# Altium PCB MP2225.PcbDoc
Units mil, origin at the board's own origin, x right, y up, seen from the top; angles counter-clockwise.
Board outline 600 x 635 mil, 2 copper layers (Top Layer, Bottom Layer); 15 components, 8 nets, 33 pads, 0 vias.
Unrouted connection lines stored in the file: 15.
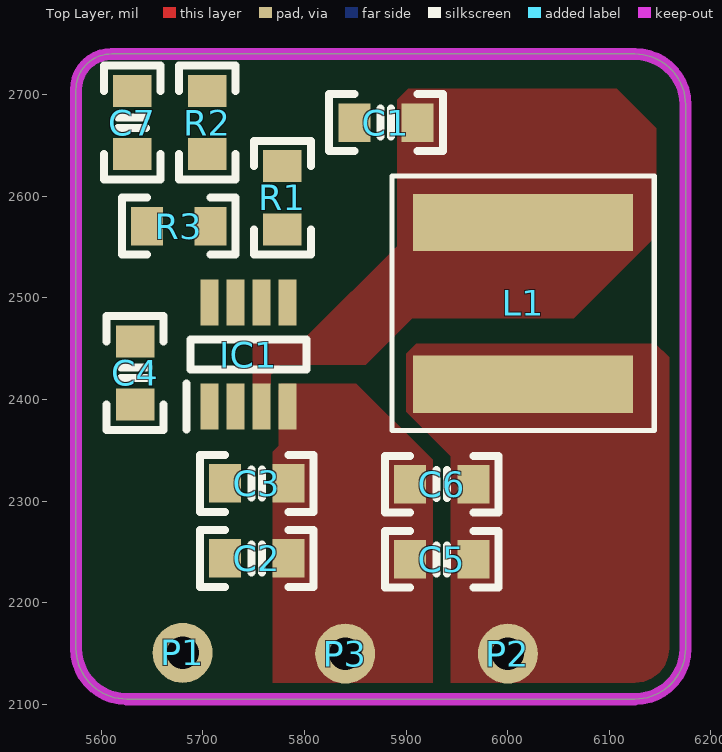
[diagram p0: Top Layer view]
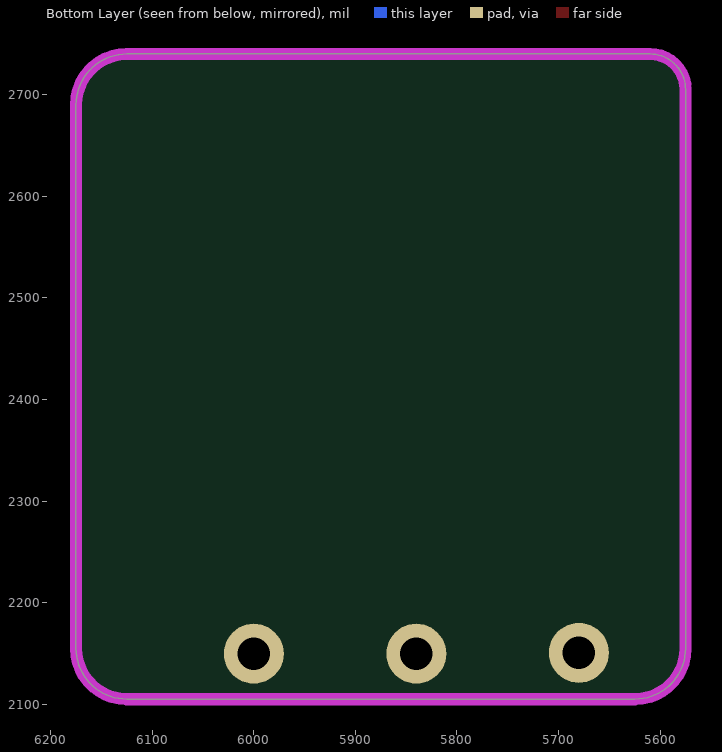
[diagram p1: Bottom Layer view, seen from below]

## Layer stack, top to bottom
Top Solder: solder mask 0.4, Solder Resist, Dk 3.5
Top Layer: signal copper 1.4
Dielectric 1: dielectric 12.6, FR-4, Dk 4.8
Bottom Layer: signal copper 1.4
Bottom Solder: solder mask 0.4, Solder Resist, Dk 3.5

## Board outline
5575,2155 5575,2705 cw(c5610,2705) 5610,2740 6125,2740 cw(c6125,2690) 6175,2690 6175,2155 cw(c6125,2155) 6125,2105 5625,2105 cw(c5625,2155)

## Design rules (kind name [scope] priority, off if disabled: settings)
Clearance [All] p1: gap=10 ignorepadtopadclearanceinfootprint=FALSE except(0: Arc-Hole Track-Hole SMDPad-Fill SMDPad-Poly SMDPad-Region SMDPad-Hole THPad-Hole Via-Hole Fill-Hole Poly-Hole Region-Hole Text-Hole)
PlaneConnect [All] p1: planeconnectstyle=Direct reliefexpansion=20 reliefentries=4 reliefconductorwidth=10 reliefairgap=10
PolygonConnect [All] p1: connectstyle=Direct reliefconductorwidth=10 reliefentries=4 polygonreliefangle="90 Angle" airgapwidth=10
RoutingVias [All] p1: holewidth=17.72 width=29.53 viastyle="Through Hole" minholewidth=17.72 minwidth=29.53 maxholewidth=17.72 maxwidth=29.53
SolderMaskExpansion [All] p1: expansion=4 istentingtop=FALSE
Width [All] p1: maxlimit=100 minlimit=10 preferedwidth=15
29 further rules are at their usual default settings.

## Components (designator, comment, footprint, x,y, rotation, side; value= is the part's Value field where it differs from the comment)
C1 "100nF" CAP-0603 5880,2672.5 r180 top
C2 "22uF/25V" CAP-0603 5753,2243.51 r180 top
C3 "100nF/25V" CAP-0603 5753,2317.39 r180 top
C4 "100nF" CAP-0603 5633.17,2426.1 r90 top
C5 "22uF/10V" CAP-0603 5935,2242.67 r0 top
C6 "22uF/10V" CAP-0603 5935,2316.56 r0 top
C7 "33pF" CAP-0603 5630.35,2672.46 r90 top
IC1 "MP2225GJ-P" TSOT-23-8 5745,2443.98 r90 top locked
L1 "4.7uH 6.8A" XAL6060-103MEB 6015,2494.53 r90 top
P1 "HDR1x2_2.54" HDR1X1_2.54 5680,2150.56 r90 top
P2 "HDR1x2_2.54" HDR1X1_2.54 6000,2149.73 r90 top
P3 "HDR1x2_2.54" HDR1X1_2.54 5840,2149.73 r90 top
R1 "100k" R-0603 5778.12,2598.58 r270 top
R2 "40.2k" R-0603 5704.23,2672.46 r90 top
R3 "5.49k" R-0603 5676.23,2570.58 r0 top

## Footprints (in the part's own frame and the unit in brackets; to place one, negate y for a bottom-side part, rotate by r counter-clockwise, add the part's x,y. Pads: shape width x height; smd on the part's side, far side on the other; paste and mask are expansions set on the pad)
CAP-0603 [mm]
  rect 0.8x0.96 smd: 1(-0.79,0) 2(0.79,0)
  silkscreen extent -1.42,-0.71 1.42,0.71, body extent -0.76,-0.39 0.76,0.39, height 0.9
HDR1X1_2.54 [mm]
  round 1.5 hole 0.813: 1(0,0)
R-0603 [mm]
  rect 0.8x0.96 smd: 1(-0.79,0) 2(0.79,0)
  silkscreen extent -1.42,-0.71 1.42,0.71, body extent -0.76,-0.38 0.76,0.38, height 0.41
TSOT-23-8 [mm]
  rect 1.15x0.45 smd: 1(-1.3,0.975) 2(-1.3,0.325) 3(-1.3,-0.325) 4(-1.3,-0.975) 5(1.3,-0.975) 6(1.3,-0.325) 7(1.3,0.325) 8(1.3,0.975)
  silkscreen extent -1.88,-1.45 0.38,1.55, body extent -1.4,-1.45 1.4,1.45, height 1
XAL6060-103MEB [mm]
  rect 1.43x5.5 smd: 1(-2.02,0) 2(2.02,0)
  silkscreen extent -3.18,-3.28 3.18,3.28, body extent -3.18,-3.26 3.18,3.26, height 6.1

## Part data
C1 C2 C3 C4 C5 C6 C7: library part CAP, "贴片电容", Package=0402, SuppliersPartNumber=C52923, ComponentLink1Description=供应商链接, ComponentLink1URL=http://www.szlcsc.com/product/details_53938.html, Supplier=LC
IC1: "稳压芯片", Manufacturer_Name="Monolithic Power Systems (MPS)", Mouser Part Number=946-MP2225GJ-P, Datasheet Link=https://altium.componentsearchengine.com/Datasheets/1/MP2225GJ-P.pdf, Height=1mm, Manufacturer_Part_Number=MP2225GJ-P, Mouser Price/Stock=https://www.mouser.co.uk/ProductDetail/Monolithic-Power-Systems-MPS/MP2225GJ-P?qs=CjgjetG5vV6PhweCipdhAQ%3D%3D
L1: library part INDUCTOR, "电感", Package=0402, SuppliersPartNumber=C32041, ComponentLink1Description=供应商链接, ComponentLink1URL=http://www.szlcsc.com/product/details_33003.html, Supplier=LC
P1 P2 P3: library part HDR1x1_2.54, "Header"
R1 R2 R3: library part RES, "贴片电阻", Package=0805, SuppliersPartNumber=C17798, Supplier=LC

## Nets (pads, with @x,y where several pads share a name; then routed paths per layer and width w, separated by ;. In a path a pad name is that pad's centre, name@x,y a point inside that pad or via, vN(x,y) a via of type N, cw(c..) or ccw(c..) an arc to the next point about the centre after c; other vN are vias at no path point)
5V: C5.2 C6.2 C7.2 L1.1 P2.1 R2.2
GND: C2.1 C3.1 C4.1 C5.1 C6.1 IC1.1 IC1.4 P3.1 R3.1
NetC1_2: C1.2 IC1.5
NetC4_2: C4.2 IC1.7
NetC7_1: C7.1 IC1.8 R2.1 R3.2
NetIC1_6: IC1.6 R1.2
SW: C1.1 IC1.3 L1.2
VIN: C2.2 C3.2 IC1.2 P1.1 R1.1

## Polygon pours and split planes (outlines as drawn)
GND on Top Layer "NONET_L01_P-001" (solid, pour order 2): 5774.5,2415.5 5774.5,2354.5 5768.5,2348.5 5768.5,2105 5926,2105 5926,2340.5 5851,2415.5
SW on Top Layer "NONET_L01_P-001" (solid, pour order 1): 5749,2415 5749,2455 5756,2462 5802,2462 5891,2551 5891,2695 5902,2706 6107,2706 6146,2667 6146,2561 6065,2480 5906,2480 5860,2434 5776,2434 5766.5,2424.5 5766.5,2415
5V on Top Layer "NONET_L01_P-001" (solid, pour order 0): 5944,2344 5944,2105 6125,2105 ccw(c6125,2155) 6175,2155 6175,2425 6145,2455 5910,2455 5900,2445 5900,2388

## Keep-outs
Keep-Out Layer:
  the board outline again, w12

## Silkscreen, mask and mechanical layers (free items; w line width, h text height)
Mechanical 1:
  the board outline again, w12